# Altium PCB PCB_TASIYICIFEZA2_2024-11-27.pcbdoc
Units mm, origin at the board's own origin, x right, y up, seen from the top; angles counter-clockwise.
Board outline 93.65 x 93.65 mm, 2 copper layers (Top Layer, Bottom Layer); 4 components, 5 nets, 70 pads, 1 vias.
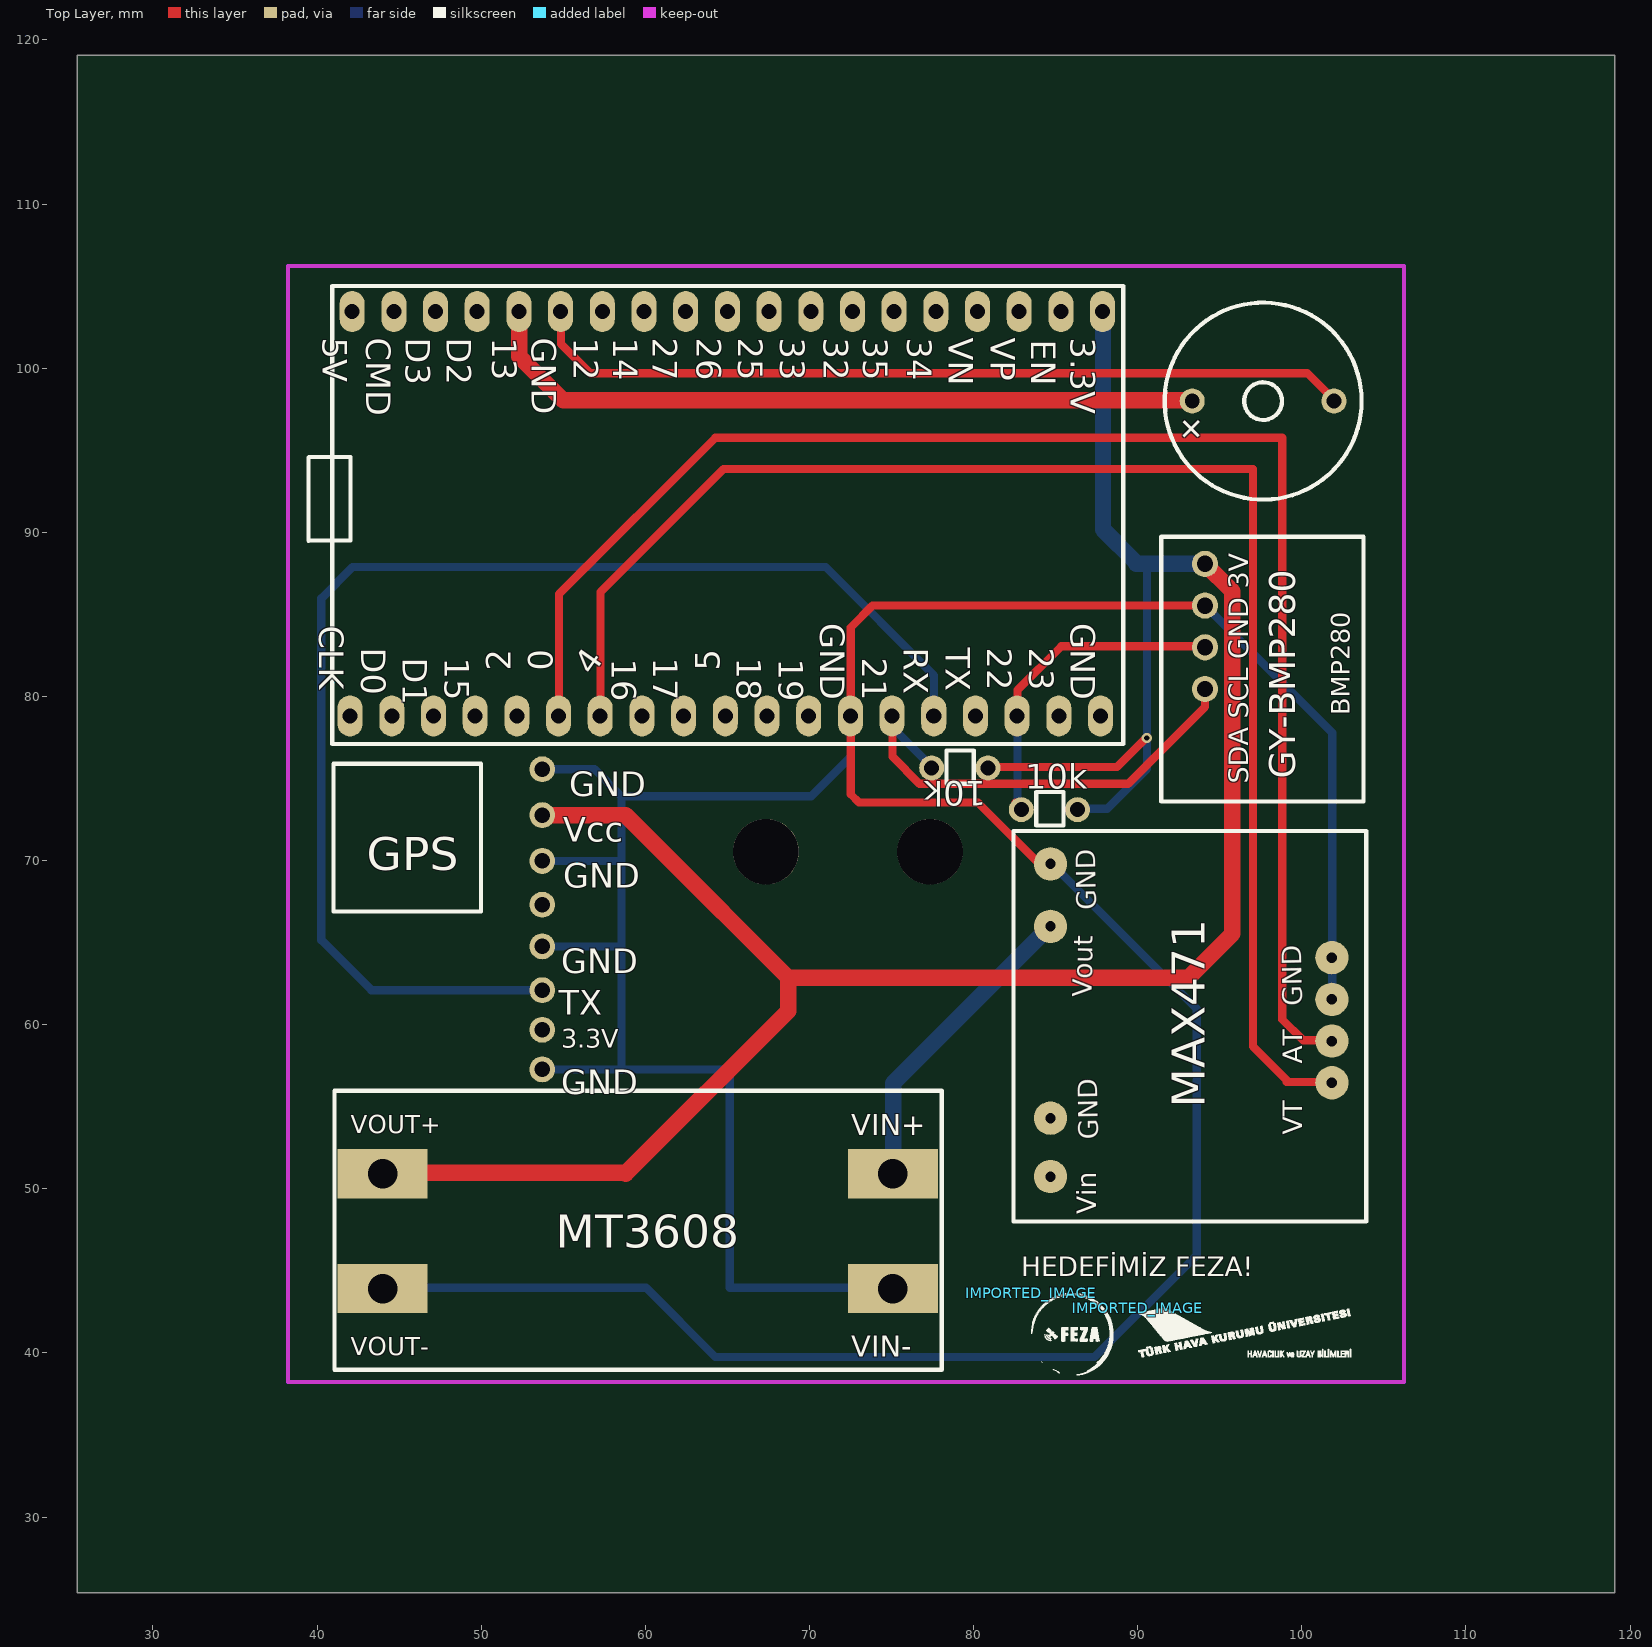
[diagram p0: Top Layer view]
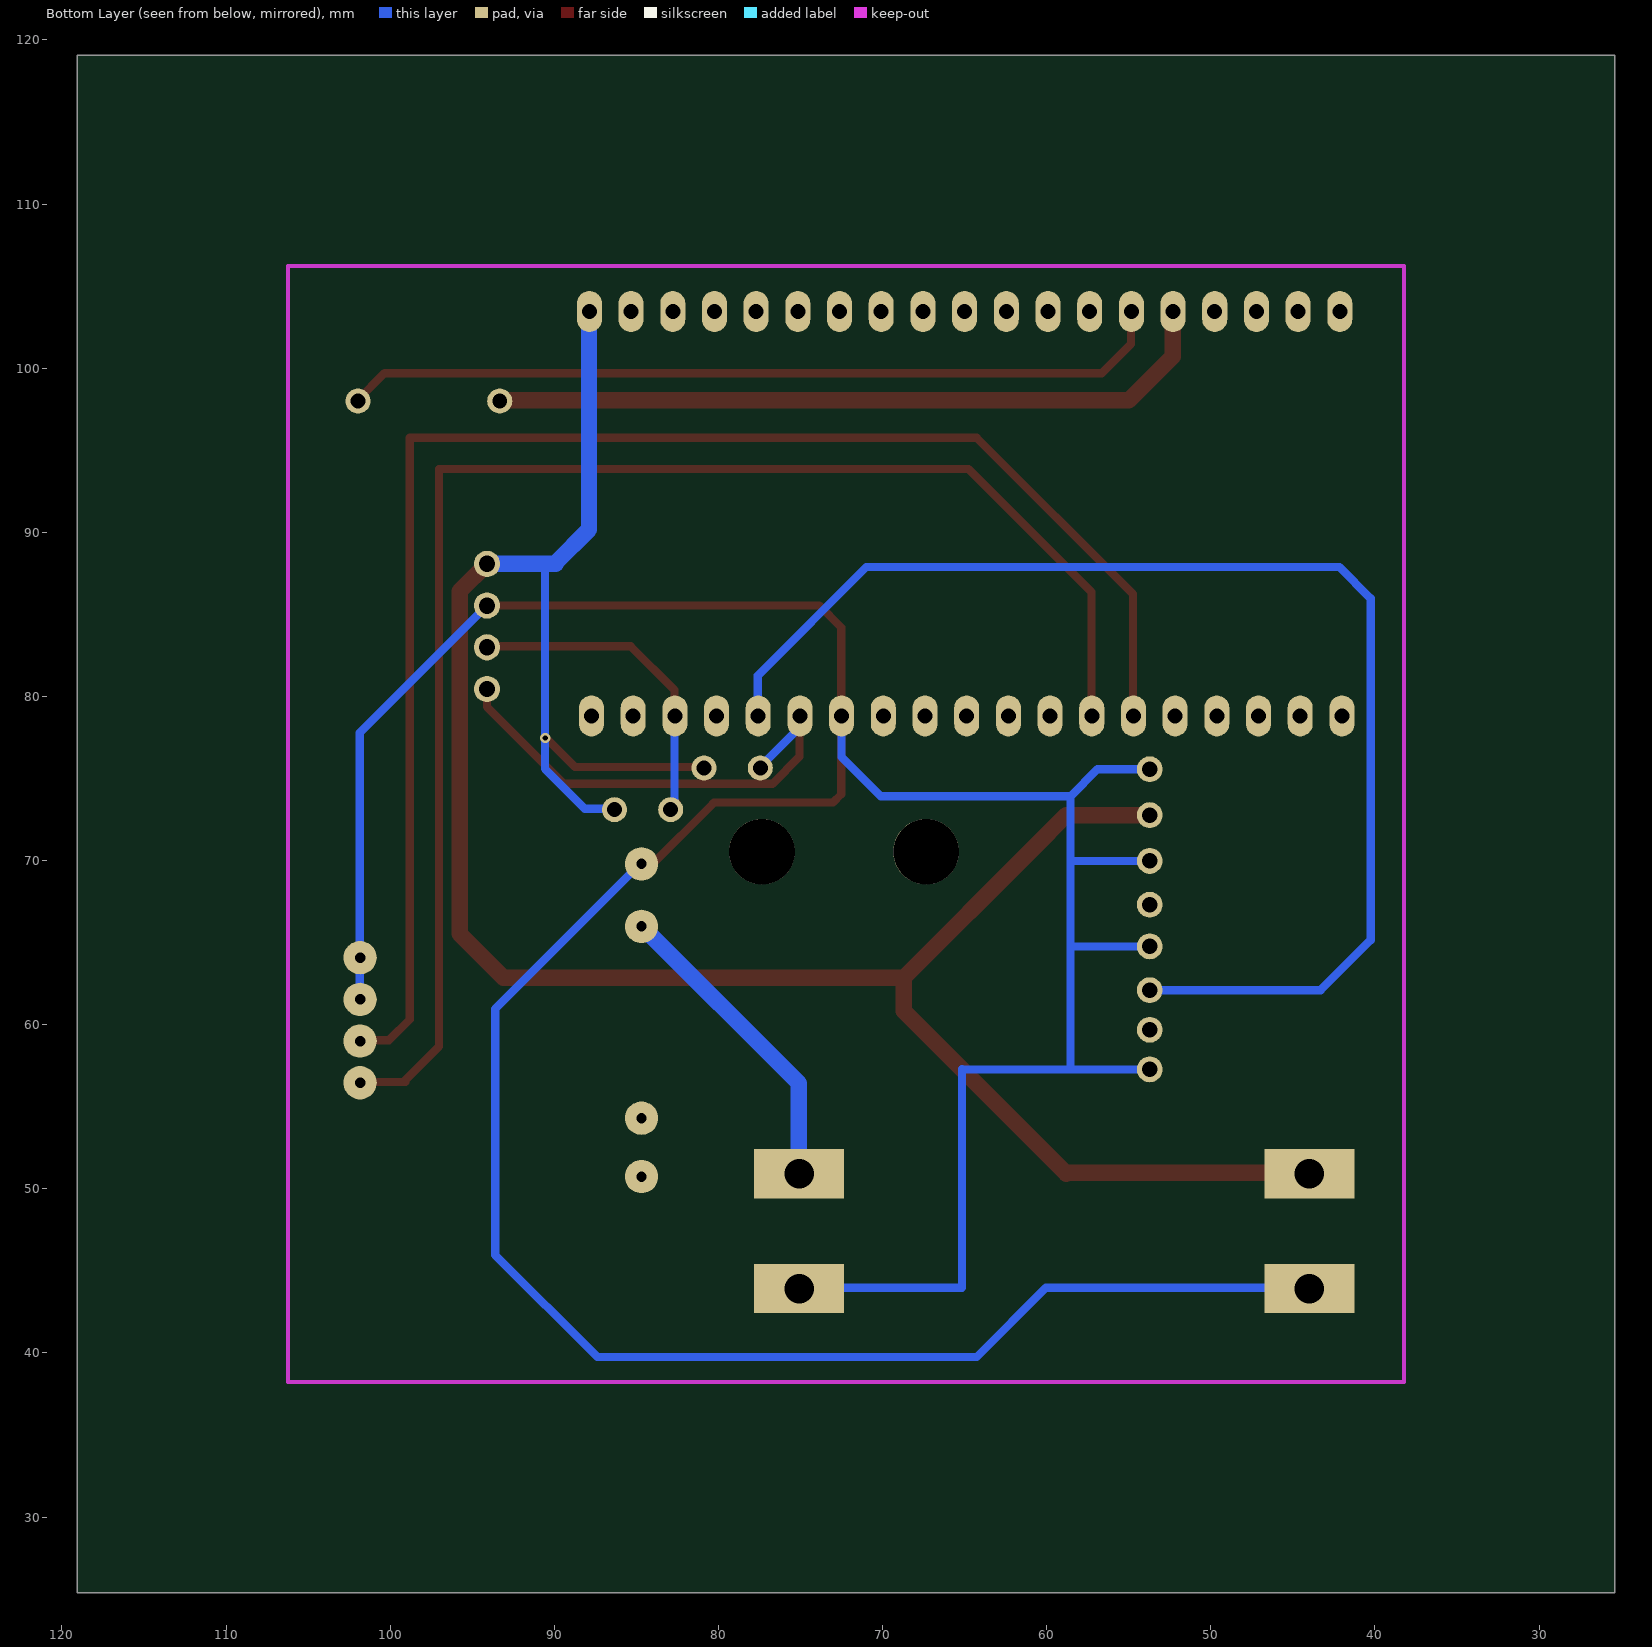
[diagram p1: Bottom Layer view, seen from below]

## Layer stack, top to bottom
Top Layer: signal copper (thickness not stored)
Dielectric: dielectric 0.32, FR-4, Dk 4.8
Bottom Layer: signal copper (thickness not stored)

## Board outline
119.054,25.4 25.4,25.4 25.4,119.055 119.054,119.055

## Components (designator, comment, footprint, x,y, rotation, side; value= is the part's Value field where it differs from the comment)
3.3V "MT3608" ?#1 59.54,48.208 r0 top
BMP280 "GY-BMP80" ?#2 96.647,81.661 r90 top
IMPORTED_IMAGE "IMPORTED_IMAGE" IMPORTED_IMAGE 89.997,42.714 r0 top
IMPORTED_IMAGE "IMPORTED_IMAGE" IMPORTED_IMAGE 83.515,43.646 r0 top

## Footprints (in the part's own frame and the unit in brackets; to place one, negate y for a bottom-side part, rotate by r counter-clockwise, add the part's x,y. Pads: shape width x height; smd on the part's side, far side on the other; paste and mask are expansions set on the pad)
IMPORTED_IMAGE [mm]
  silkscreen extent 0,-2.99 13,0.01
?#1 [mm]
  rect 5.5x3 hole 1.798 paste+0 mask+0.102: 1(-15.546,-4.284) 1(-15.546,2.715) 1(15.546,-4.284) 1(15.546,2.715)
?#2 [mm]
  round 1.6 hole 1 paste+0 mask+0.051: 1(-1.207,2.546) 1(1.333,2.546) 1(3.873,2.546) 1(6.413,2.546)
  silkscreen extent -8.06,-7.11 8.06,5.21

## Free pads (board coordinates)
  round 1.524 hole 0.914 paste+0 mask+0.051: 1(77.447,75.64) 1(82.908,73.1) 2(80.876,75.64) 2(86.337,73.1)
  round 2.032 hole 0.635 paste+0 mask+0.102: 1(84.686,50.748) 1(84.686,54.304) 1(84.686,65.988) 1(84.686,69.798) 1(101.831,56.463) 1(101.831,59.003) 1(101.831,61.543) 1(101.831,64.083)
  oval 1.524x2.5 hole 0.914 paste+0 mask+0.102: 1(87.861,103.453) 2(85.321,103.453) 3(82.781,103.453) 4(80.241,103.453) 5(77.701,103.453) 6(75.161,103.453) 7(72.621,103.453) 8(70.081,103.453) 9(67.541,103.453) 10(65.001,103.453) 11(62.461,103.453) 12(59.921,103.453) 13(57.381,103.453) 14(54.841,103.453) 15(52.301,103.453) 16(49.761,103.453) 17(47.221,103.453) 18(44.681,103.453) 19(42.141,103.453) 20(42.014,78.815) 21(44.554,78.815) 22(47.094,78.815) 23(49.634,78.815) 24(52.174,78.815) 25(54.714,78.815) 26(57.254,78.815) 27(59.794,78.815) 28(62.334,78.815) 29(64.874,78.815) 30(67.414,78.815) 31(69.954,78.815) 32(72.494,78.815) 33(75.034,78.815) 34(77.574,78.815) 35(80.114,78.815) 36(82.654,78.815) 37(85.194,78.815) 38(87.734,78.815)
  round 1.524 hole 0.91 paste+0 mask+0.102: 1(93.322,97.992)
  round 1.524 hole 0.914 paste+0 mask+0.102: 2(101.958,97.992)
  round 1.575 hole 0.945 paste+0 mask+0.102: 42(53.721,67.31) 43(53.721,64.77) 44(53.721,62.103) 45(53.721,57.277) 45(53.721,59.69) 45(53.721,69.977) 45(53.721,72.771) 45(53.721,75.565)
  round 4 hole 4 unplated paste+0: ""(67.347,70.54) ""(77.347,70.54)

## Via types
v1: diameter 0.62, hole 0.31, Top Layer to Bottom Layer, tented both sides, 1 vias

## Nets (pads, with @x,y where several pads share a name; then routed paths per layer and width w, separated by ;. In a path a pad name is that pad's centre, name@x,y a point inside that pad or via, vN(x,y) a via of type N, cw(c..) or ccw(c..) an arc to the next point about the centre after c; other vN are vias at no path point)
S$7: 
S$10864: pad.1@93.322,97.992 pad.15 | length 44.9
  Top Layer w1: pad.15@52.324,103.505 52.324,100.711 54.991,98.044 pad.1@93.345,98.044
S$12195: pad.34 pad.35 pad.44 | length 78.8
  Bottom Layer w0.5: pad.44 43.307,62.103 40.259,65.151 40.259,85.979 42.164,87.884 70.993,87.884 77.597,81.28 pad.34@77.597,78.867
U1_3: pad.30
VOUT-: 3.3V.1 BMP280.1 pad.1@77.447,75.64 pad.1@82.908,73.1 pad.1@84.686,50.748 pad.1@84.686,54.304 pad.1@84.686,65.988 pad.1@84.686,69.798 pad.1@87.861,103.453 pad.1@101.831,56.463 pad.1@101.831,59.003 pad.1@101.831,61.543 pad.1@101.831,64.083 pad.2@80.876,75.64 pad.2@86.337,73.1 pad.2@101.958,97.992 pad.3 pad.4 pad.8 pad.14 pad.16 pad.19 pad.25 pad.26 pad.27 pad.28 pad.31 pad.32 pad.33 pad.36 pad.38 pad.42 pad.43 pad.45 | length 696.5
  Top Layer w0.5: pad.25@54.737,78.867 54.737,86.233 64.262,95.758 98.806,95.758 98.806,60.325 100.076,59.055 pad.1@101.854,59.055 ; pad.14@54.864,103.505 54.864,101.473 56.642,99.695 100.33,99.695 pad.2@101.981,98.044 ; pad.26@57.277,78.867 57.277,86.36 64.77,93.853 97.028,93.853 97.028,58.674 99.06,56.642 99.06,56.515 101.854,56.515 pad.1@101.981,56.388 ; 3.3V.1@73.2,50.975 3.3V.1@75.109,50.975 ; pad.33@75.057,78.867 75.057,76.327 76.708,74.676 89.408,74.676 94.101,79.369 BMP280.1@94.101,80.455 ; pad.2@80.899,75.692 88.745,75.692 v1@90.574,77.522 ; pad.1@82.55,73.533 pad.1@82.931,73.152 ; pad.36@82.677,78.867 82.677,80.391 85.344,83.058 94.037,83.058 BMP280.1@94.101,82.995 ; pad.1@84.709,69.85 83.947,69.85 80.518,73.279 80.264,73.533 73.025,73.533 72.517,74.041 72.517,78.867 72.517,84.201 73.85,85.535 BMP280.1@94.101,85.535
  Top Layer w1: 3.3V.1@44.017,50.975 58.753,50.975 58.801,50.927 68.707,60.833 68.707,62.865 ; pad.45@53.721,72.771 58.801,72.771 60.833,70.739 68.707,62.865 ; BMP280.1@94.102,88.075 95.758,86.418 95.758,65.532 93.091,62.865 68.707,62.865
  Bottom Layer w0.5: 3.3V.1@44.017,43.976 60.037,43.976 64.262,39.751 87.376,39.751 93.599,45.974 93.599,60.96 pad.1@84.709,69.85 ; pad.45@53.721,57.277 65.151,57.277 ; pad.43 58.547,64.77 ; pad.45@53.721,69.977 58.547,69.977 ; pad.45@53.721,75.565 56.896,75.565 58.547,73.914 ; 58.547,57.277 58.547,73.914 ; 65.151,57.295 65.151,43.975 71.976,43.975 3.3V.1@75.109,43.976 ; pad.32 72.494,76.304 70.104,73.914 58.547,73.914 ; pad.33@75.057,78.867 75.057,78.105 pad.1@77.47,75.692 ; pad.36@82.677,78.867 82.677,73.406 pad.1@82.931,73.152 ; pad.2@86.36,73.152 88.138,73.152 90.574,75.588 90.574,88.075 ; BMP280.1@94.101,85.535 101.854,77.781 101.854,64.135 101.854,61.595 pad.1@101.854,62.09
  Bottom Layer w1: 3.3V.1@75.109,50.975 75.109,56.44 pad.1@84.709,66.04 ; pad.1@87.884,103.505 87.884,90.17 89.916,88.138 89.916,88.075 BMP280.1@94.101,88.075
  other v1: 90.551,77.47

## Silkscreen, mask and mechanical layers (free items; w line width, h text height)
Top Overlay:
  circle w0.254: c97.64,97.992 r6
  circle w0.254: c97.64,97.992 r1.15
  lines w0.254: 39.474,89.483 39.474,94.563 ; 39.507,89.502 42.047,89.502 42.047,94.582 39.507,94.582 ; 40.924,77.109 89.124,77.109 89.124,105.009 40.924,105.009 40.924,77.109 ; 40.998,66.894 49.998,66.894 49.998,75.894 40.998,75.894 40.998,66.894 ; 41.063,38.975 78.063,38.975 78.063,55.975 41.063,55.975 41.063,38.975 ; 78.359,74.676 80.01,74.676 80.01,76.708 78.359,76.708 78.359,74.676 ; 82.423,48.006 103.923,48.006 103.923,71.806 82.423,71.806 82.423,48.006 ; 83.82,72.136 85.471,72.136 85.471,74.168 83.82,74.168 83.82,72.136
  text "5V" at 40.335,101.852 h1.5 r270
  text "CMD" at 43.002,101.852 h1.5 r270
  text "D3" at 45.415,101.852 h1.5 r270
  text "D2" at 47.888,101.852 h1.5 r270
  text "13" at 50.682,101.852 h1.5 r270
  text "GND" at 53.095,101.852 h1.5 r270
  text "12" at 55.635,101.852 h1.5 r270
  text "14" at 58.048,101.852 h1.5 r270
  text "27" at 60.461,101.852 h1.5 r270
  text "26" at 63.128,101.852 h1.5 r270
  text "25" at 65.668,101.852 h1.5 r270
  text "33" at 68.208,101.852 h1.5 r270
  text "32" at 70.875,101.852 h1.5 r270
  text "35" at 73.288,101.852 h1.5 r270
  text "34" at 75.955,101.852 h1.5 r270
  text "VN" at 78.495,101.852 h1.5 r270
  text "VP" at 81.035,101.852 h1.5 r270
  text "3.3V" at 85.928,101.852 h1.5 r270
  text "EN" at 83.515,101.725 h1.5 r270
  text "+" at 94.372,96.17 h1.52 r135
  text "GND" at 70.665,84.453 h1.5 r270
  text "GND" at 85.928,84.453 h1.5 r270
  text "CLK" at 40.141,84.316 h1.5 r270
  text "D0" at 42.685,82.98 h1.5 r270
  text "RX" at 75.753,82.98 h1.5 r270
  text "TX" at 78.297,82.98 h1.5 r270
  text "22" at 80.84,82.98 h1.5 r270
  text "23" at 83.384,82.98 h1.5 r270
  text "D1" at 45.228,82.365 h1.5 r270
  text "15" at 47.772,82.365 h1.5 r270
  text "17" at 60.491,82.365 h1.5 r270
  text "18" at 65.578,82.365 h1.5 r270
  text "21" at 73.209,82.365 h1.5 r270
  text "16" at 57.947,82.297 h1.5 r270
  text "19" at 68.122,82.297 h1.5 r270
  text "2" at 51.816,81.575 h1.5 r90
  text "0" at 54.359,81.575 h1.5 r90
  text "5" at 64.534,81.575 h1.5 r90
  text "4" at 56.768,81.214 h1.5 r55
  text "10k" at 80.768,74.822 h1.5 r180
  text "10k" at 83.162,74.382 h1.5
  text "GND" at 55.372,73.926 h1.5
  text "Vcc" at 54.991,71.132 h1.5
  text "GPS" at 43.03,69.417 h2.03
  text "GND" at 54.991,68.338 h1.5
  text "GND" at 87.861,67.004 h2.03 r91
  text "GND" at 54.864,63.131 h1.5
  text "Vout" at 87.607,61.67 h2.03 r89
  text "GND" at 100.434,61.162 h2.03 r91
  text "TX" at 54.737,60.591 h1.5
  text "AT" at 100.434,57.606 h2.03 r90
  text "GND" at 54.864,55.765 h1.5
  text "MAX471" at 94.084,54.939 h2.03 r90
  text "VT" at 100.434,53.288 h2.03 r90
  text "GND" at 87.988,53.034 h2.03 r91
  text "Vin" at 87.861,48.462 h2.03 r90
  text "HEDEFİMİZ FEZA!" at 82.908,44.271 h2.03
Document:
  lines w0.003: 72.227,72.227 72.227,72.228

## Text inside footprints (layer, text, board x,y; h text height)
3.3V: Top Overlay "VIN+" at 72.54,53.273 h1.3; Top Overlay "VIN-" at 72.54,39.773 h1.3; Top Overlay "VOUT+" at 42.04,53.373 h1.1; Top Overlay "VOUT-" at 42.04,39.873 h1.1
BMP280: Top Overlay "SDA SCL GND 3V" at 96.739,74.676 h1.2 r90; Top Overlay "GY-BMP280" at 99.584,74.993 h1.6 r90